# Altium PCB PCB_EPM.PcbDoc
Units mm, origin at the board's own origin, x right, y up, seen from the top; angles counter-clockwise.
Board outline 75.25 x 43.29 mm, 4 copper layers (Top Layer, Internal Plane 1, Internal Plane 2, Bottom Layer); 53 components, 48 nets, 228 pads, 45 vias.
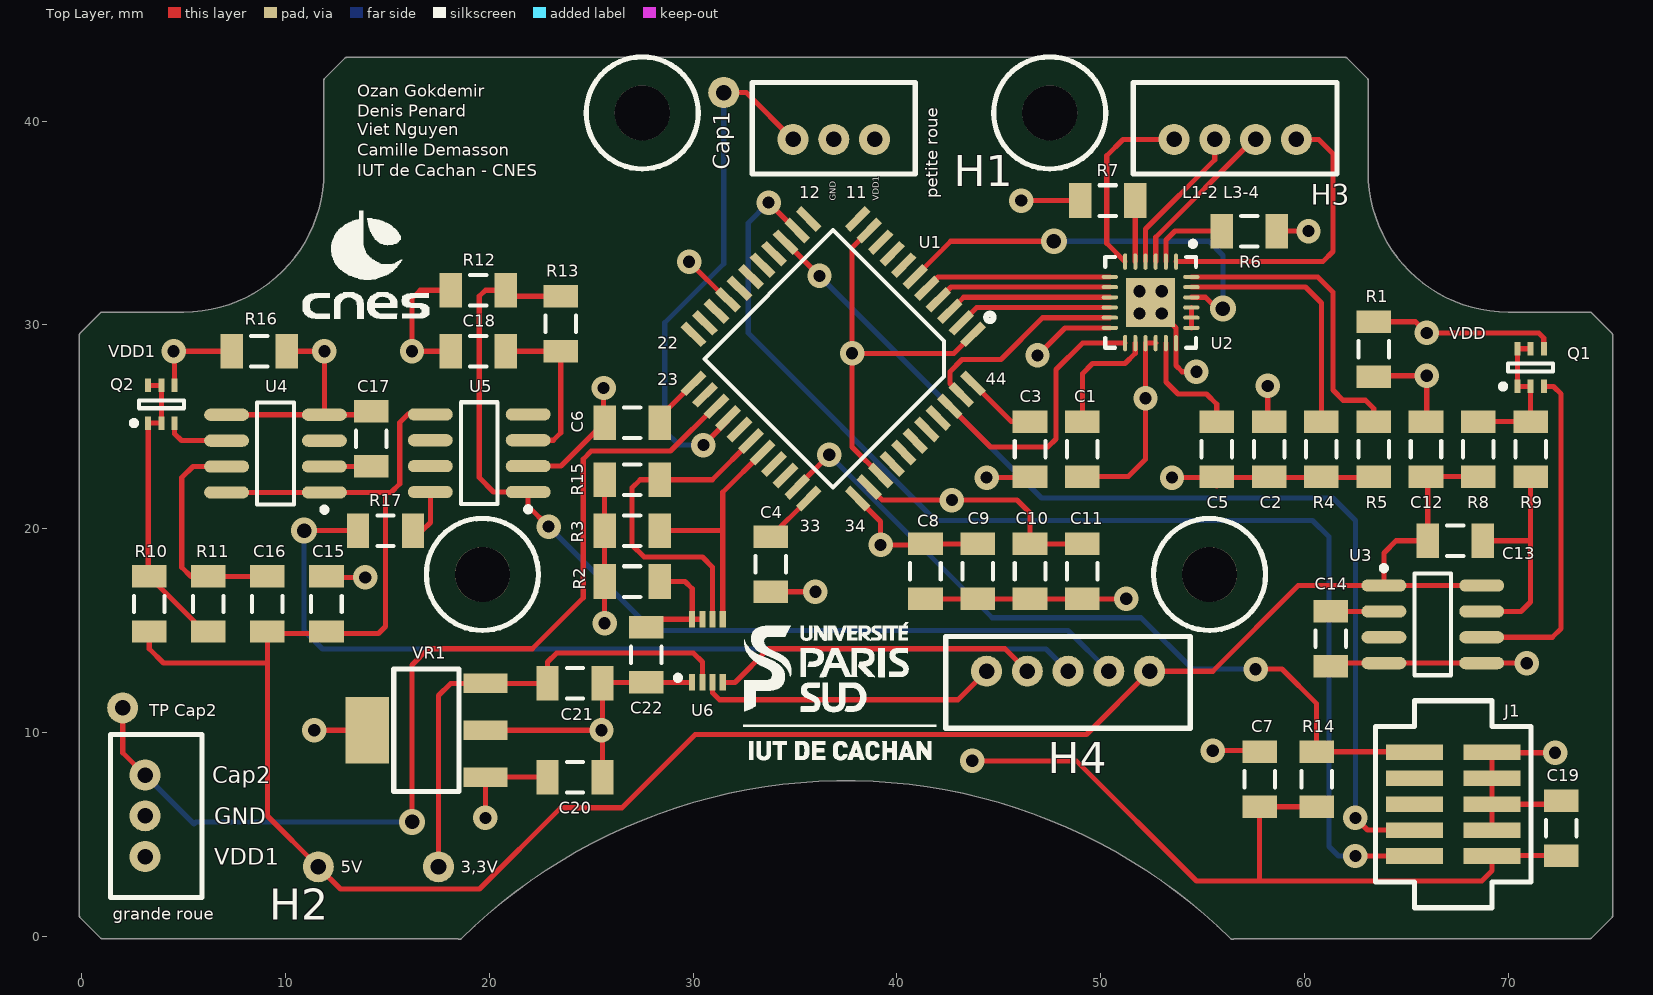
[diagram p0: Top Layer view]
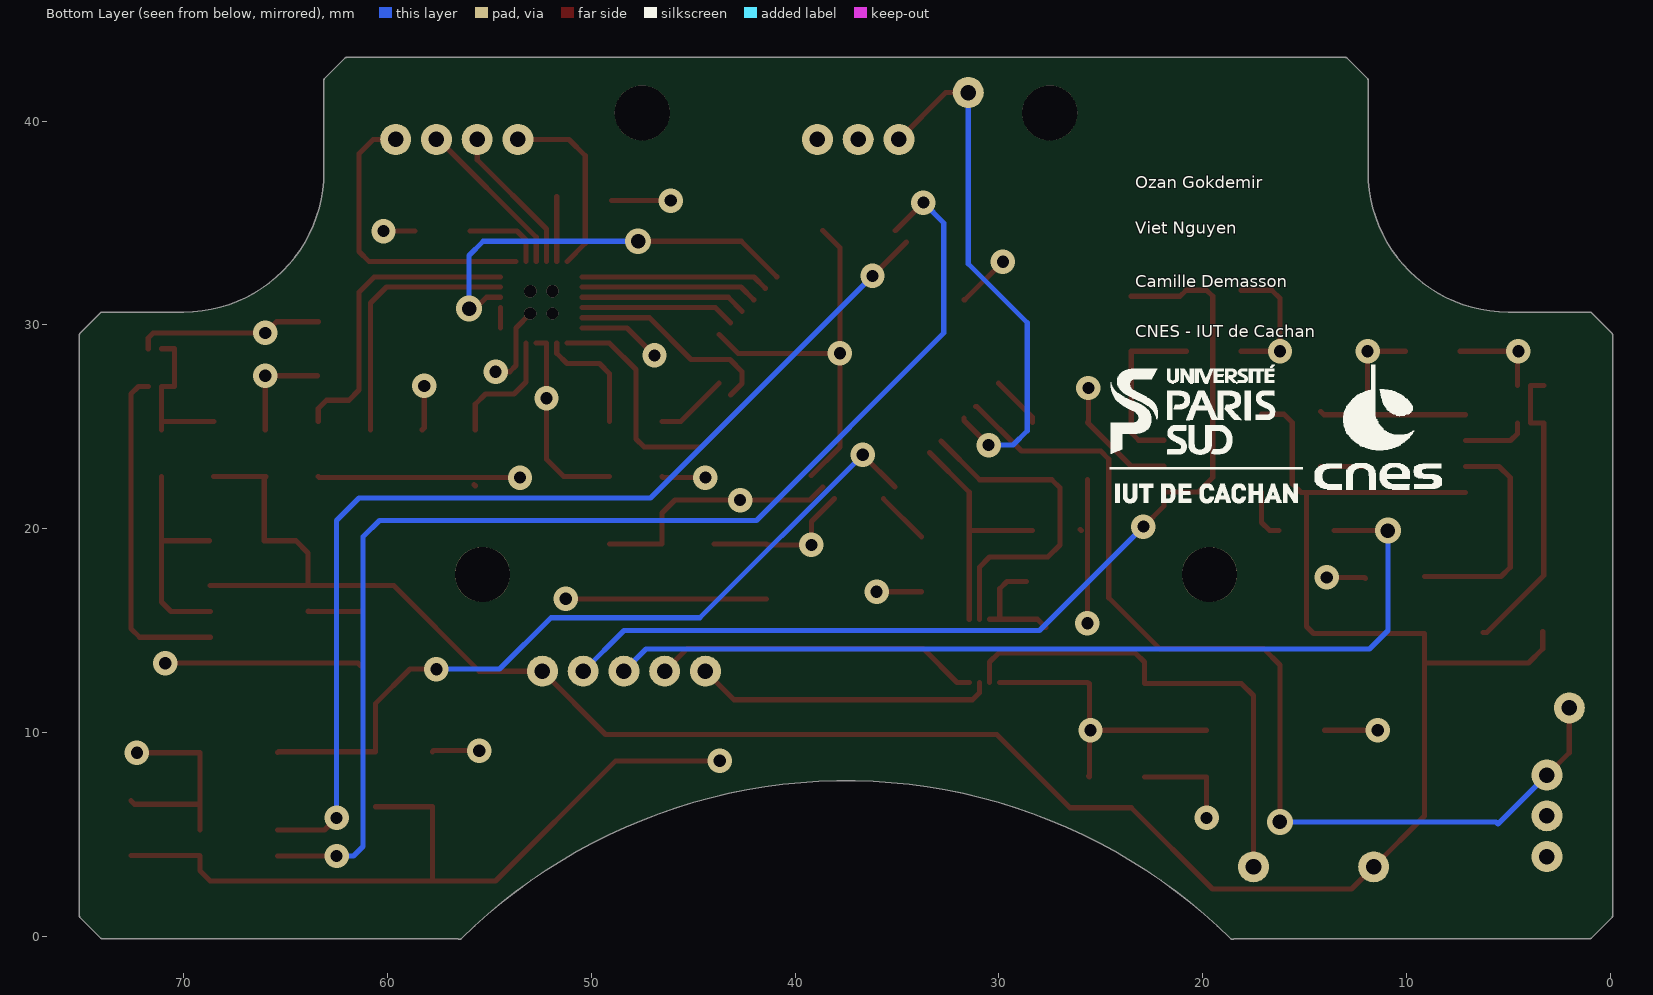
[diagram p1: Bottom Layer view, seen from below]
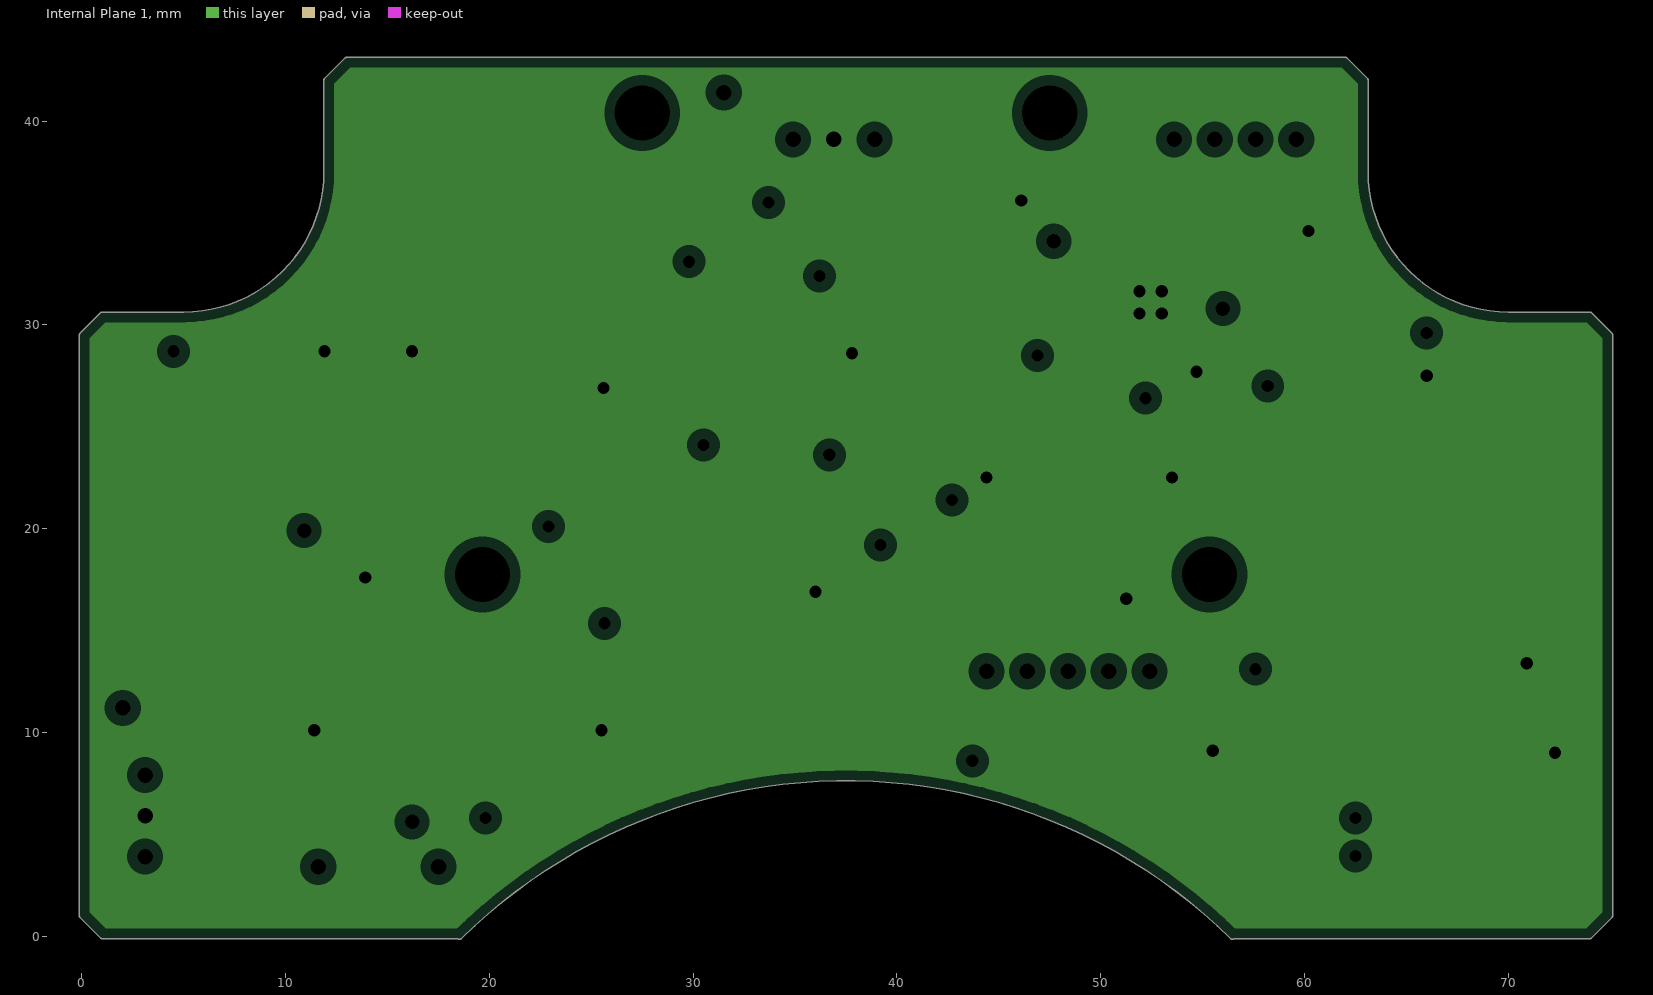
[diagram p2: Internal Plane 1, clearances drawn from the general rule]
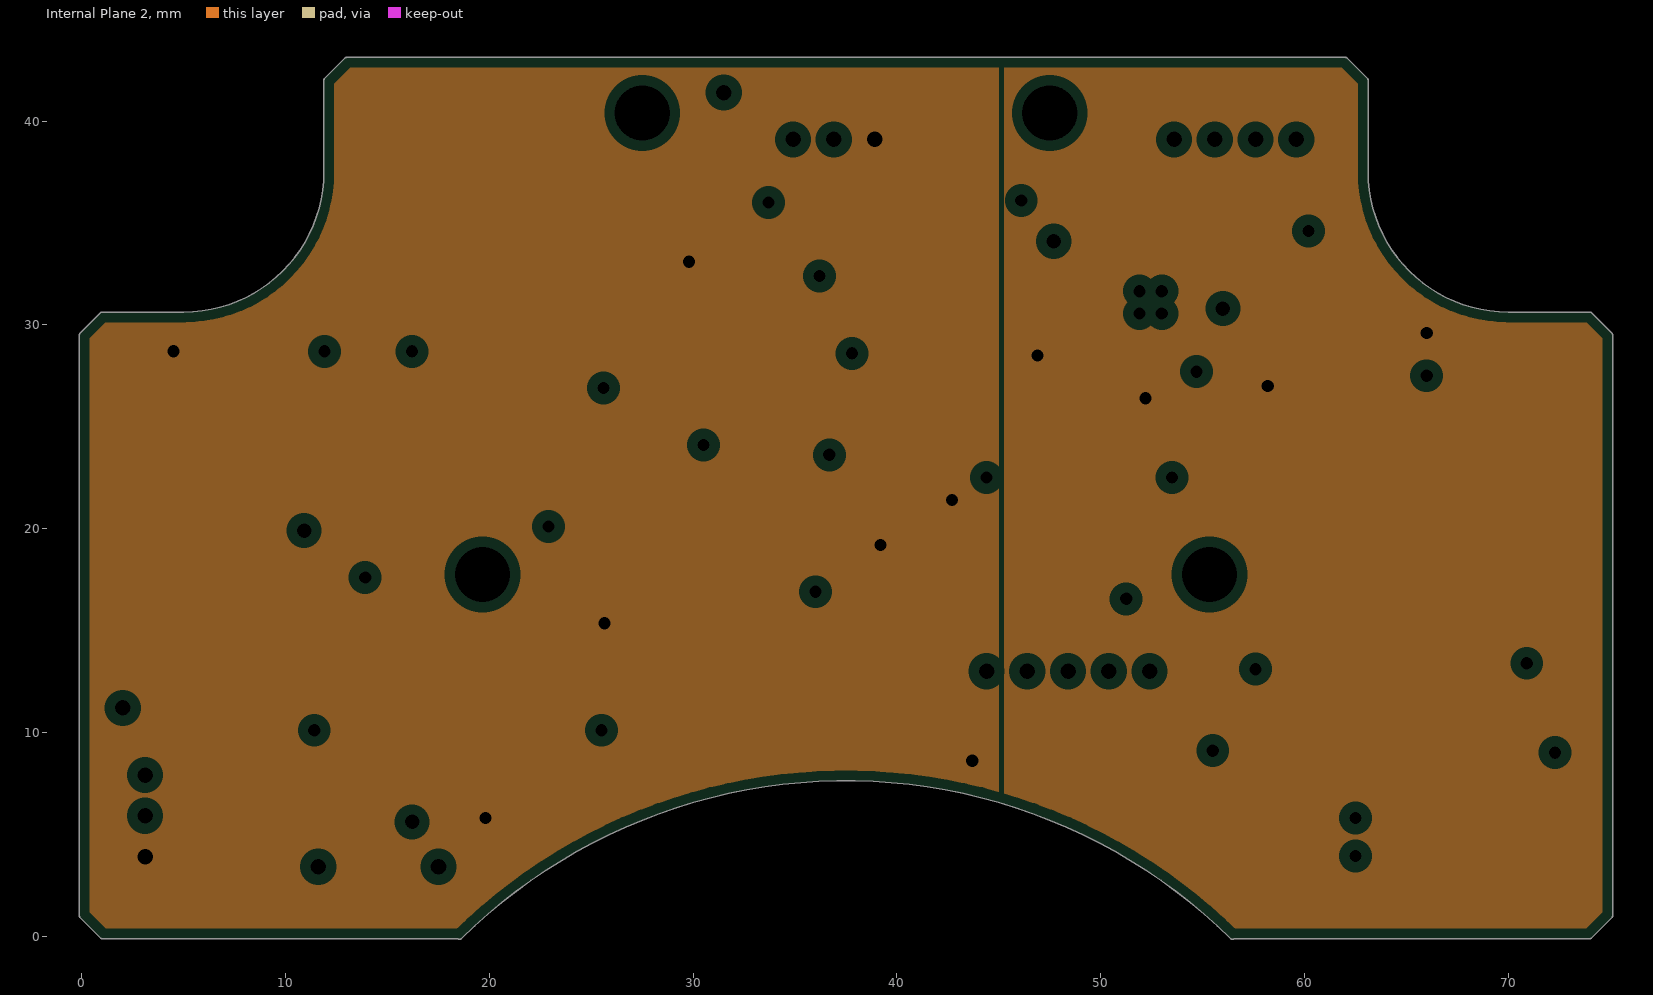
[diagram p3: Internal Plane 2, clearances drawn from the general rule]

## Layer stack, top to bottom
Top Solder: solder mask 0.0102, Solder Resist, Dk 3.5
Top Layer: signal copper 0.0356
Dielectric1: core 0.32, FR-4, Dk 4.8
Internal Plane 1: plane copper 0.0356, net GND
Dielectric2: prepreg 0.32, FR-4, Dk 4.8
Internal Plane 2: plane copper 0.0356, net (Multiple Nets)
Dielectric3: core 0.32, FR-4, Dk 4.8
Bottom Layer: signal copper 0.0356
Bottom Solder: solder mask 0.0102, Solder Resist, Dk 3.5

## Board outline
-0.09,0.909 cw(c0,1) -0.127,1 -0.127,29.5 cw(c0,29.5) -0.09,29.591 -0.09,29.59 0.91,30.59 0.909,30.59 cw(c1,30.5) 1,30.627 5,30.627 ccw(c5,37.5) 11.873,37.499 ccw(c5,37.5) 11.873,37.5 11.873,42 cw(c12,42) 11.91,42.091 11.91,42.09 12.91,43.09 12.909,43.09 cw(c13,43) 13,43.127 62,43.127 cw(c62,43) 62.091,43.09 62.09,43.09 63.09,42.09 63.09,42.091 cw(c63,42) 63.127,42 63.127,37.5 cw(c63,37.5) 63.127,37.499 ccw(c70,37.5) 70,30.627 74,30.627 cw(c74,30.5) 74.09,30.59 75.09,29.59 cw(c75,29.5) 75.127,29.5 75.127,1 cw(c75,1) 75.09,0.91 74.09,-0.09 cw(c74,0) 74,-0.127 56.553,-0.127 cw(c56.467,-0.034) 56.377,-0.125 ccw(c37.5,-19.25) 18.623,-0.125 cw(c18.533,-0.034) 18.447,-0.127 1,-0.127 cw(c1,0) 0.909,-0.09 0.91,-0.09

## Design rules (kind name [scope] priority, off if disabled: settings)
Clearance [All] p1: gap=0.2
ComponentClearance ComponentClearance_psoc [InComponent('U1')] p1: gap=0 collisioncheckmode=3 verticalgap=0 showdistances=FALSE
ComponentClearance [All] p2: gap=0.254 collisioncheckmode=3 verticalgap=0.254 showdistances=FALSE
MinimumSolderMaskSliver [All] p1: minsoldermaskwidth=0.1
PlaneClearance [All] p1: clearance=0.508
PlaneConnect PlaneConnect_driver [(InNet('GND') AND InComponent('U2'))] p1: planeconnectstyle=Direct reliefexpansion=0.508 reliefentries=4 reliefconductorwidth=0.254 reliefairgap=0.254
PlaneConnect [All] p2: planeconnectstyle=Relief reliefexpansion=0.508 reliefentries=4 reliefconductorwidth=0.254 reliefairgap=0.254
PolygonConnect [All] p1: connectstyle=Relief reliefconductorwidth=0.254 reliefentries=4 polygonreliefangle="90 Angle" airgapwidth=0.254
RoutingVias [All] p1: holewidth=0.711 width=1.27 viastyle="Through Hole" minholewidth=0.711 minwidth=1.27 maxholewidth=0.711 maxwidth=1.27
SolderMaskExpansion [All] p1: expansion=0.102
Width [All] p1: maxlimit=0.254 minlimit=0.254 preferedwidth=0.254
26 further rules are at their usual default settings.

## Classes and differential pairs
component class "Microcontrôleur PSoC 4": C3 C4 C6 C8 C9 C10 C11 C22 R2 R3 R15 U6
component class "Pilote du Moteur": C1 C2 C5 R4 R5 R6 R7 U2
component class sch_epm4.0: C19 H1 H3 H4 J1
component class Alimentation: C12 C13 C14 C15 C16 C17 C18 C20 C21 Q1 Q2 R1 R8 R9 R10 R11 R12 R13 R16 R17 U3 U4 U5 VR1

## Components (designator, comment, footprint, x,y, rotation, side; value= is the part's Value field where it differs from the comment)
C1 "Cap Semi" C1206 49.1,23.9 r270 top
C2 "Cap Semi" C1206 58.267,23.9 r270 top
C3 "" C1206 46.533,23.9 r270 top
C4 "" C1206 33.8,18.25 r90 top
C5 "Cap Semi" C1206 55.7,23.9 r90 top
C6 "" C1206 27,25.2 r0 top
C7 "" C1206 57.8,7.7 r270 top
C8 "" C1206 41.4,17.9 r90 top
C9 "" C1206 43.967,17.9 r90 top
C10 "" C1206 46.533,17.9 r90 top
C11 "" C1206 49.1,17.9 r90 top
C12 "Cap Semi" C1206 65.967,23.9 r90 top
C13 "Cap Semi" C1206 67.4,19.4 r0 top
C14 "Cap Semi" C1206 61.3,14.6 r270 top
C15 "Cap Semi" C1206 12,16.3 r90 top
C16 "Cap Semi" C1206 9.1,16.3 r90 top
C17 "Cap Semi" C1206 14.2,24.4 r90 top
C18 "Cap Semi" C1206 19.45,28.7 r0 top
C19 "" C1206 72.6,5.3 r270 top
C20 "Cap Semi" C1206 24.2,7.8 r0 top
C21 "Cap Semi" C1206 24.2,12.4 r0 top
C22 "" C1206 27.7,13.8 r90 top
H1 "MOLEX" B3B-PH-K-S 32.9,37.4 r0 top
H2 "MOLEX" B3B-PH-K-S 1.4,9.9 r270 top
H3 "MOLEX" B4B-PH-K-S 51.6,37.4 r0 top
H4 "MOLEX" B5B-PH-K-S 54.4,14.7 r180 top
J1 "connecteur programmation PSoC" 50MIL_KEYED_SMD 69.21,3.93 r180 top
Q1 "MOSFET-N" ONSC-SC70-6-419B-02_V 71.1,27.9 r90 top
Q2 "MOSFET-N" ONSC-SC70-6-419B-02_V 3.9,26.1 r90 top
R1 "Res3" C1206 63.4,28.8 r90 top
R2 "R2" C1206 27,17.4 r180 top
R3 "" C1206 27,19.9 r180 top
R4 "Res3" C1206 60.833,23.9 r90 top
R5 "Res3" C1206 63.4,23.9 r90 top
R6 "Res3" C1206 57.3,34.6 r180 top
R7 "Res3" C1206 50.35,36.1 r180 top
R8 "Res3" C1206 68.533,23.9 r270 top
R9 "Res3" C1206 71.1,23.9 r270 top
R10 "Res3" C1206 3.3,16.3 r270 top
R11 "Res3" C1206 6.2,16.3 r90 top
R12 "Res3" C1206 19.45,31.7 r0 top
R13 "Res3" C1206 23.5,30.05 r270 top
R14 "" C1206 60.6,7.7 r270 top
R15 "" C1206 27,22.4 r180 top
R16 "Res3" C1206 8.7,28.7 r0 top
R17 "Res3" C1206 14.9,19.9 r0 top
U1 "CY8C4245AXI-483 44TQFP" CY8C4xxxAXI 43.728,29.533 r225 top
U2 "DRV8834RGET" QFN24 52.45,31.1 r270 top
U3 "LTC1153" "S8 Package" 66.3,15.3 r0 top
U4 "LTC1153" "S8 Package" 9.5,23.68 r180 top
U5 "DS2438" SO8_N 19.5,23.7 r180 top
U6 "PCA9306" VSSOP8 30.7,14 r90 top
VR1 "Volt Reg" Reg_LM317 14.8,10.1 r90 top

## Footprints (in the part's own frame and the unit in brackets; to place one, negate y for a bottom-side part, rotate by r counter-clockwise, add the part's x,y. Pads: shape width x height; smd on the part's side, far side on the other; paste and mask are expansions set on the pad)
50MIL_KEYED_SMD [mil]
  rect 110x30 smd: 1(0,0) 2(150,0) 3(0,-50) 4(150,-50) 5(0,-100) 6(150,-100) 7(0,-150) 8(150,-150) 9(0,-200) 10(150,-200)
  silkscreen extent -75,-300 225,100
B3B-PH-K-S [mil] "Connecteur JST série PH 3 broches"
  round 60 hole 30: 1(78.74,66.93) 2(157.48,66.93) 3(236.22,66.93)
  silkscreen extent 0,0 315,177
B4B-PH-K-S [mil] "Connecteur JST série PH 4 broches"
  round 60 hole 30: 1(78.74,66.93) 2(157.48,66.93) 3(236.22,66.93) 4(314.96,66.93)
  silkscreen extent 0,0 394,177
B5B-PH-K-S [mil] "Connecteur JST série PH 5 broches"
  round 60 hole 30: 1(78.74,66.93) 2(157.48,66.93) 3(236.22,66.93) 4(314.96,66.93) 5(393.7,66.93)
  silkscreen extent 0,0 472,177
C1206 [mm] "Chip Capacitor, Body 3.2x1.6mm, IPC High Density"
  rect 1.1x1.7 smd: 1(-1.35,0) 2(1.35,0)
  silkscreen extent -0.4,-0.75 0.4,0.75, body extent -1.7,-0.9 1.7,0.9, height 1.3
CY8C4xxxAXI [mm]
  rect 1.4x0.4 smd mask+0.1: 1(0,0) 2(0,-0.8) 3(0,-1.6) 4(0,-2.4) 5(0,-3.2) 6(0,-4) 7(0,-4.8) 8(0,-5.6) 9(0,-6.4) 10(0,-7.2) 11(0,-8) 23(11.4,-8) 24(11.4,-7.2) 25(11.4,-6.4) 26(11.4,-5.6) 27(11.4,-4.8) 28(11.4,-4) 29(11.4,-3.2) 30(11.4,-2.4) 31(11.4,-1.6) 32(11.4,-0.8) 33(11.4,0)
  rect 0.4x1.4 smd mask+0.1: 12(1.7,-9.7) 13(2.5,-9.7) 14(3.3,-9.7) 15(4.1,-9.7) 16(4.9,-9.7) 17(5.7,-9.7) 18(6.5,-9.7) 19(7.3,-9.7) 20(8.1,-9.7) 21(8.9,-9.7) 22(9.7,-9.7) 34(9.7,1.7) 35(8.9,1.7) 36(8.1,1.7) 37(7.3,1.7) 38(6.5,1.7) 39(5.7,1.7) 40(4.9,1.7) 41(4.1,1.7) 42(3.3,1.7) 43(2.5,1.7) 44(1.7,1.7)
  silkscreen extent -1.36,-8.47 10.17,0.46
ONSC-SC70-6-419B-02_V [mm] "SOT23, 6-Leads, Body 2x1.25mm, Pitch 0.65mm"
  rect 0.66x0.3 smd: 1(-0.925,0.65) 2(-0.925,0) 3(-0.925,-0.65) 4(0.925,-0.65) 5(0.925,0) 6(0.925,0.65)
  silkscreen extent -1.05,-1.1 0.2,1.47, body extent -0.63,-1 0.63,1, height 1.1
QFN24 [mm] "QFN, 24-Leads, Body 4,00x4,00mm, Pitch 0,50mm, Thermal Pad 2,40x2,40mm, IPC Medium Density"
  oval 0.8x0.2 smd: 1(-2,1.25) 2(-2,0.75) 3(-2,0.25) 4(-2,-0.25) 5(-2,-0.75) 6(-2,-1.25) 13(2,-1.25) 14(2,-0.75) 15(2,-0.25) 16(2,0.25) 17(2,0.75) 18(2,1.25)
  oval 0.2x0.8 smd: 7(-1.25,-2) 8(-0.75,-2) 9(-0.25,-2) 10(0.25,-2) 11(0.75,-2) 12(1.25,-2) 19(1.25,2) 20(0.75,2) 21(0.25,2) 22(-0.25,2) 23(-0.75,2) 24(-1.25,2)
  rect 2.4x2.4 smd: 25(0,0)
  silkscreen extent -3,-2.22 2.22,2.23, body extent -2.08,-2.07 2.07,2.08, height 1
Reg_LM317 [mm]
  rect 0.95x2.15 smd mask+0.07: 1(-2.3,-5) 2(0,-5) 3(2.3,-5)
  rect 3.25x2.15 smd mask+0.07: 4(0,0.8)
  silkscreen extent -3,-3.7 3,-0.5
"S8 Package" [mm] "SOIC, 8-Leads, Body 4,90x3,90mm, Pitch 1,27mm, IPC Medium Density"
  oval 2.2x0.6 smd: 1(-2.4,1.905) 2(-2.4,0.635) 3(-2.4,-0.635) 4(-2.4,-1.905) 5(2.4,-1.905) 6(2.4,-0.635) 7(2.4,0.635) 8(2.4,1.905)
  silkscreen extent -2.52,-2.5 0.9,2.88, body extent -2,-2.5 2,2.5, height 1.76
SO8_N [mm] "SOIC, 8-Leads, Body 4.9x3.9mm, Pitch 1.27mm, IPC Medium Density"
  oval 2.2x0.6 smd: 1(-2.4,1.905) 2(-2.4,0.635) 3(-2.4,-0.635) 4(-2.4,-1.905) 5(2.4,-1.905) 6(2.4,-0.635) 7(2.4,0.635) 8(2.4,1.905)
  silkscreen extent -2.53,-2.5 0.9,2.88, body extent -2,-2.5 2,2.5, height 1.75
VSSOP8 [mm] "TSSOP, 8-Leads, Body 2,00x2,30mm"
  rect 0.8x0.3 smd paste+0 mask+0.05: 1(-1.55,0.75) 2(-1.55,0.25) 3(-1.55,-0.25) 4(-1.55,-0.75) 5(1.55,-0.75) 6(1.55,-0.25) 7(1.55,0.25) 8(1.55,0.75)
  silkscreen extent -1.45,1.33 -1.2,1.57, body extent -1.2,-1.05 1.2,1.05, height 0.9

## Part data
C1 C2 C5 C12 C13 C14 C15 C16 C17 C18 C20 C21: "Capacitor (Semiconductor SIM Model)"
C3 C4 C6 C7 C8 C9 C10 C11 C19 C22: library part "Cap Semi", "Capacitor (Semiconductor SIM Model)"
H1 H2: library part "Molex Male 3 broches", "MOLEX-53048-0510_FARNELL_9732918"
H3: library part "Molex Male 4 broches_1", "MOLEX-53048-0510_FARNELL_2064326"
H4: library part "Molex Male 5 broches", "MOLEX-53048-0510_FARNELL_2064326"
J1: library part "Header 5X2", "Header, 5-Pin, Dual row"
Q1 Q2: library part CMP-1058-00626-1, "Trench Power MOSFET, 20 V, 4 A, Single N-Channel, 6-Pin SC70, Pb-Free, Tape and Reel"
R1 R4 R5 R6 R7 R8 R9 R10 R11 R12 R13 R16 R17: "Resistor"
R2 R3 R14 R15: library part Res1, "Resistor"
U1: library part CY8C4xxxAXI
U5: "Battery Monitor"
VR1: "Voltage Regulator"

## Free pads (board coordinates)
  round 1.524 hole 0.762: 0(11.6,3.4) 0(17.5,3.4) 0(31.5,41.4) 2(2,11.2)
  round 2.7 hole 2.7 unplated: 0(19.655,17.75) 0(27.5,40.4) 0(47.5,40.4) 0(55.345,17.75)

## Via types
v1: diameter 1.2, hole 0.6, Top Layer to Bottom Layer, 37 vias
v2: diameter 1.27, hole 0.711, Top Layer to Bottom Layer, 4 vias
v3: diameter 0.6, hole 0.6, Top Layer to Bottom Layer, 4 vias

## Nets (pads, with @x,y where several pads share a name; then routed paths per layer and width w, separated by ;. In a path a pad name is that pad's centre, name@x,y a point inside that pad or via, vN(x,y) a via of type N, cw(c..) or ccw(c..) an arc to the next point about the centre after c; other vN are vias at no path point)
3.3V: C21.1 pad.0@17.5,3.4 U6.2 VR1.3 | length 24.3
  Top Layer w0.254: pad.0@17.5,3.1 17.5,3.4 17.5,11.8 18.1,12.4 VR1.3 C21.1 22.85,13.45 23.3,13.9 30,13.9 30.45,13.45 U6.2
5V: C12.1 C13.1 C15.1 C16.1 H4.1 pad.0@11.6,3.4 R8.2 R10.2 U3.1 U3.8 U4.1 U4.8 U5.5 | length 118.8
  Top Layer w0.254: R10.2 3.3,14.1 4,13.4 9.1,13.4 ; U4.8 U4.1 14.9,21.775 ; U5.5@17.1,25.61 16.01,25.61 15.6,25.2 15.6,22.2 15.175,21.775 14.9,21.775 ; U3.1 63.9,18.8 64.5,19.4 C13.1 66.05,22.467 C12.1 R8.2 ; U3.8 65.3,17.205 65.295,17.2 59.7,17.2 55.5,13 H4.1 49.3,9.9 30.1,9.9 26.5,6.3 23.5,6.3 19.511,2.311 12.689,2.311 11.6,3.4 9.1,5.9 9.1,13.4 ; 9.1,13.4 9.1,14.85 14.55,14.85 14.9,15.2 14.9,21.775
/XRES: J1.10 R14.1 U1.32 | length 38.4
  Top Layer w0.254: U1.32 v1(36.682,23.618) ; v1(57.6,13.1) 58.9,13.1 60.6,11.4 R14.1 65.36,9.05 J1.10
  Bottom Layer w0.254: v1(36.682,23.618) 44.677,15.623 51.977,15.623 54.5,13.1 v1(57.6,13.1)
CAP1: H1.1 pad.0@31.5,41.4 U1.26 | length 26.2
  Top Layer w0.254: v1(30.5,24.1) 31.708,25.308 U1.26 ; pad.0@31.5,41.4 32.6,41.4 H1.1
  Bottom Layer w0.254: v1(30.5,24.1) 29.3,24.1 28.6,24.8 28.6,30.1 31.5,33 pad.0@31.5,41.4
CAP2: H2.1 pad.2 U1.25 | length 49.8
  Top Layer w0.254: pad.2 2,9 H2.1 ; v2(16.2,5.6) 16.2,13.3 17,14.1 22.1,14.1 24.6,16.6 24.6,23.4 25,23.8 28.889,23.8 31.086,25.997 U1.25
  Bottom Layer w0.254: H2.1 5.5,5.5 5.6,5.6 v2(16.2,5.6)
DIR: U1.3 U2.9 | length 8.1
  Top Layer w0.254: U1.3 43.283,31.35 U2.9
DQ: H4.3 R17.1 | length 45.9
  Top Layer w0.254: v2(10.9,19.9) R17.1
  Bottom Layer w0.254: v2(10.9,19.9) 10.9,15 11.811,14.089 47.311,14.089 H4.3
GND: C2.2 C3.2 C4.1 C5.1 C6.1 C7.1 C8.1 C9.1 C10.1 C11.1 C12.2 C14.2 C15.2 C17.2 C18.1 C19.1 C20.2 C21.2 C22.1 H1.2 H2.2 J1.3 J1.5 J1.7 J1.9 R1.1 R4.1 R5.1 R6.1 R7.2 R12.1 R16.2 U1.1 U1.10 U1.36 U2.18 U2.25 U3.4 U3.5 U4.4 U4.5 U5.2 U6.1 VR1.2 VR1.4 | length 123.9
  Top Layer w0.254: U4.5 U4.4 ; R16.2 v1(11.9,28.7) U4.4 ; v1(11.4,10.1) VR1.4 ; C15.2@12,17.55 12.05,17.6 v1(13.9,17.6) ; C17.2 14.035,25.585 U4.4 ; C18.1 v1(16.2,28.7) 16.2,31.3 16.6,31.7 R12.1 ; VR1.2 v1(25.5,10.1) ; U5.2 23.515,23.065 C6.1 25.6,25.25 v1(25.6,26.9) ; C21.2 25.55,10.15 v1(25.5,10.1) ; C20.2@25.6,7.85 C20.2 25.55,10.05 v1(25.5,10.1) ; C21.2@25.6,12.4 25.65,12.45 C22.1 U6.1 ; C4.1 v1(36,16.9) ; U1.10 37.8,33.787 v1(37.8,28.6) ; U1.36 37.8,24.006 v1(37.8,28.6) ; C8.1 C9.1 C10.1 C11.1 v1(51.25,16.55) ; U1.1 42.796,28.6 v1(37.8,28.6) ; v1(44.4,22.5) 46.483,22.5 C3.2 ; v1(46.1,36.1) R7.2 ; v3(53,30.55) 53.7,29.85 U2.18 53.7,28 54,27.7 v1(54.7,27.7) ; v1(53.5,22.5) 63.35,22.5 R5.1 ; v1(55.5,9.1) 57.75,9.1 C7.1 ; C5.1@55.7,22.1 C5.1@55.75,22.15 ; R6.1 v1(60.2,34.6) ; C14.2@61.25,13.3 C14.2 61.445,13.395 U3.4 U3.5 70.905,13.395 v1(70.91,13.39) ; R1.1@63.45,27.5 v1(66,27.5) ; v1@65.95,27.45 v1(66,27.5) ; C12.2@66,24.85 v1(66,27.5) ; J1.3 J1.5 ; v1(72.3,9) 69.22,9 J1.9 J1.7 J1.5 ; C19.1 72.42,6.47 J1.5
  other v3: 51.9,30.55 51.9,31.65 53,31.65
GND0: H4.2 R12.2 R13.1 U5.1 | length 48.4
  Top Layer w0.254: v1(22.9,20.1) 21.9,21.1 U5.1 20.205,21.795 19.5,22.5 19.5,31.4 19.8,31.7 R12.2 21.1,31.4 R13.1
  Bottom Layer w0.254: v1(22.9,20.1) 28,15 48.4,15 H4.2
M0: U1.2 U2.10 | length 7.6
  Top Layer w0.254: U1.2 43.914,30.85 U2.10
M1: U1.43 U2.11 | length 10.3
  Top Layer w0.254: U1.43 42.6,27.125 42.6,27.7 43.2,28.3 45.1,28.3 47.15,30.35 U2.11
NEN: U1.5 U2.7 | length 9.2
  Top Layer w0.254: U1.5 42.02,32.35 U2.7
NetC3_1: C3.1 U1.44 | length 3.6
  Top Layer w0.254: U1.44 45.607,25.25 C3.1
NetC5_2: C5.2 U2.17 | length 6.1
  Top Layer w0.254: U2.17 53.2,27.189 53.789,26.6 55.2,26.6 55.7,26.1 C5.2 C5.2@55.7,24.85
NetC6_2: C6.2 U1.23 | length 2.6
  Top Layer w0.254: C6.2 28.35,25.468 U1.23
NetC13_2: C13.2 R9.2 U3.7 | length 11.1
  Top Layer w0.254: U3.7 70.635,15.935 71.1,16.4 71.1,19.4 ; C13.2 71.1,19.4 ; R9.2 71.1,19.4
NetC14_1: C14.1 U3.2 | length 2.6
  Top Layer w0.254: C14.1 61.315,15.935 U3.2 U3.2@63.885,15.95
NetC16_2: C16.2 R11.2 U4.7 | length 11.2
  Top Layer w0.254: U4.7 5.445,23.045 4.9,22.5 4.9,18.1 5.35,17.65 R11.2 C16.2
NetC17_1: C17.1 U4.2 | length 2.3
  Top Layer w0.254: U4.2 14.195,23.045 C17.1
NetC18_2: C18.2 R13.2 U5.3 | length 8.5
  Top Layer w0.254: C18.2 R13.2 23.5,24.7 23.135,24.335 U5.3
NetC22_2: C22.2 R2.1 U6.7 U6.8 | length 5.9
  Top Layer w0.254: C22.2 28.1,15.55 U6.8 ; R2.1@28.65,17.4 29.6,17.4 29.95,17.05 U6.8 ; U6.7 U6.8
NetQ1_1: Q1.1 Q1.2 Q1.5 Q1.6 R8.1 R9.1 | length 7.8
  Top Layer w0.254: R8.1 R9.1 ; R9.1@71.1,24.85 Q1.2 Q1.1 Q1.6 Q1.5
NetQ1_3: Q1.3 U3.6 | length 16.6
  Top Layer w0.254: U3.6 72.165,14.665 72.6,15.1 72.6,26.6 72.225,26.975 Q1.3
NetQ2_1: Q2.1 Q2.2 Q2.5 Q2.6 R10.1 R11.1 | length 14.8
  Top Layer w0.254: Q2.6 Q2.5 Q2.2 Q2.1 3.25,17.7 R10.1 6.05,14.9 R11.1@6.233,14.9
NetQ2_3: Q2.3 U4.6 | length 3.2
  Top Layer w0.254: Q2.3 4.55,24.65 4.885,24.315 U4.6
NetR4_2: R4.2 U2.23 | length 12.9
  Top Layer w0.254: U2.23 60.05,31.85 60.833,31.067 R4.2 R4.2@60.833,24.85
NetR5_2: R5.2 U2.24 | length 15.1
  Top Layer w0.254: U2.24 60.65,32.35 61.4,31.6 61.4,26.8 61.9,26.3 63,26.3 63.4,25.9 R5.2
NetR6_2: R6.2 U2.2 | length 4
  Top Layer w0.254: U2.2 53.2,34.158 53.642,34.6 R6.2
NetR7_1: R7.1 U2.5 | length 3.2
  Top Layer w0.254: U2.5 R7.1 R7.1@51.7,36.3
NetR17_2: R17.2 U5.8 | length 2.5
  Top Layer w0.254: R17.2 16.7,19.9 17.1,20.3 U5.8
NetU2_19: U2.19 U2.20 U2.21 | length 1
  Top Layer w0.254: U2.19 U2.20 U2.21
NFAULT: U1.42 U2.13 | length 13.5
  Top Layer w0.254: U1.42 44.594,24 47.4,24 47.8,24.4 47.8,27.8 49.1,29.1 U2.13
NSLEEP: U1.6 U2.22 | length 20.5
  Top Layer w0.254: U1.6 42.639,34.1 v2(47.7,34.1) ; U2.22 55.15,31.35 55.7,30.8 v2(56,30.8)
  Bottom Layer w0.254: v2(47.7,34.1) 55.3,34.1 56,33.4 v2(56,30.8)
OUT1A: H3.4 U2.1 | length 14.8
  Top Layer w0.254: U2.1 60.9,33.1 61.4,33.6 61.4,38.4 60.7,39.1 H3.4
OUT1B: H3.1 U2.6 | length 9.2
  Top Layer w0.254: U2.6 50.3,34 50.3,38.3 51.1,39.1 H3.1
OUT2A: H3.3 U2.3 | length 8.1
  Top Layer w0.254: U2.3 52.7,34.3 57.5,39.1 H3.3
OUT2B: H3.2 U2.4 | length 7.4
  Top Layer w0.254: U2.4 52.2,34.7 55.6,38.1 H3.2
SCL1: H4.5 U6.3 | length 14.7
  Top Layer w0.254: U6.3 30.95,11.938 31.288,11.6 43,11.6 H4.5
SCL2: R15.1 U1.28 U6.6 | length 16.5
  Top Layer w0.254: U6.6 30.95,18.1 30.45,18.6 27.6,18.6 27,19.2 27,22 27.4,22.4 R15.1 30.939,22.4 U1.28
SDA1: H4.4 U6.4 | length 16.1
  Top Layer w0.254: U6.4 32.05,12.45 33.7,14.1 45.3,14.1 H4.4
SDA2: R3.1 U1.29 U6.5 | length 12.1
  Top Layer w0.254: R3.1 31.45,19.9 ; U6.5 31.45,19.9 ; U1.29 31.45,21.78 31.45,19.9
STEP: U1.4 U2.8 | length 8.7
  Top Layer w0.254: U1.4 42.652,31.85 U2.8
SWDCLK: J1.4 U1.14 | length 51.4
  Top Layer w0.254: U1.14 36.194,32.4 v1(36.2,32.4) ; v1(62.5,5.8) 63.1,5.2 J1.4
  Bottom Layer w0.254: v1(36.2,32.4) 47.1,21.5 61.4,21.5 62.5,20.4 v1(62.5,5.8)
SWDIO: J1.2 U1.13 | length 61.1
  Top Layer w0.254: v1(33.7,36) 35.076,34.624 U1.13 ; v1(62.5,3.93) J1.2
  Bottom Layer w0.254: v1(33.7,36) 32.7,35 32.7,29.6 41.9,20.4 60.4,20.4 61.2,19.6 61.2,4.4 61.67,3.93 v1(62.5,3.93) v1@62.6,3.93
VCDD: C4.2 U1.33 | length 2.6
  Top Layer w0.254: C4.2 35.667,21.467 U1.33
VCP: C1.1 U2.14 | length 5.9
  Top Layer w0.254: C1.1 49.1,27.6 49.6,28.1 51.2,28.1 51.7,28.6 U2.14
VDD: C1.2 C2.1 Q1.4 R1.2 U2.12 U2.15 U2.16 | length 25.2
  Top Layer w0.254: v1(46.9,28.5) 48.25,29.85 U2.12 ; C1.2 51.35,22.55 52.2,23.4 v1(52.2,26.4) U2.15 U2.16 ; v1(58.2,27) 58.2,24.95 C2.1@58.3,24.85 ; R1.2 65.45,30.15 v1(66,29.6) 71.5,29.6 71.75,29.35 Q1.4
VDD1: C7.2 C8.2 C9.2 C10.2 C11.2 C19.2 C20.1 H1.3 H2.3 J1.1 Q2.4 R2.2 R3.2 R14.2 R15.2 R16.1 U1.19 U1.34 U1.35 VR1.1 | length 78.2
  Top Layer w0.254: Q2.4 4.55,28.65 v1(4.5,28.7) R16.1 ; v1(19.8,5.8) VR1.1 C20.1 ; v1(25.65,15.35) R2.2 R3.2 R15.2 ; R3.2@25.95,19.9 R3.2@26,19.95 ; v1(29.8,33.1) 31.67,31.23 U1.19 ; U1.34 39.2,20.343 v1(39.2,19.2) 41.35,19.2 C8.2 C9.2 ; U1.35 39.275,21.4 v1(42.7,21.4) 45.9,21.4 46.533,20.767 C10.2 C11.2 ; v1(43.7,8.6) 48.8,8.6 54.7,2.7 57.8,2.7 ; R14.2 C7.2 57.8,2.7 ; C19.2 69.23,3.95 J1.1 69.21,3.21 68.7,2.7 57.8,2.7
pads on no net: J1.6 J1.8 U1.7 U1.8 U1.9 U1.11 U1.12 U1.15 U1.16 U1.17 U1.18 U1.20 U1.21 U1.22 U1.24 U1.27 U1.30 U1.31 U1.37 U1.38 U1.39 U1.40 U1.41 U3.3 U4.3 U5.4 U5.6 U5.7

## Polygon pours and split planes (outlines as drawn)
GND on Internal Plane 1 (split plane): 62.617,41.841 62.617,37.502 62.586,37.503 62.585,37.5 62.617,37.5 62.617,37.499 62.627,37.114 62.657,36.728 62.708,36.345 62.778,35.965 62.868,35.589 62.978,35.218 63.107,34.854 63.255,34.497 63.422,34.148 63.606,33.808 63.808,33.479 64.027,33.16 64.262,32.854 64.513,32.56 64.779,32.279 65.06,32.013 65.354,31.762 65.66,31.527 65.979,31.308 66.308,31.106 66.648,30.922 66.997,30.755 67.354,30.607 67.718,30.478 68.089,30.368 68.465,30.278 68.845,30.208 69.228,30.157 69.614,30.127 70,30.117 73.841,30.117 74.617,29.341 74.617,1.159 73.841,0.383 56.585,0.383 56.331,0.63 55.786,1.133 55.227,1.62 54.656,2.093 54.072,2.55 53.475,2.99 52.867,3.415 52.248,3.823 51.617,4.213 50.977,4.587 50.326,4.943 49.667,5.282 48.998,5.602 48.321,5.904 47.636,6.188 46.943,6.453 46.243,6.7 45.538,6.927 44.826,7.135 44.109,7.324 43.387,7.493 42.66,7.643 41.93,7.772 41.197,7.882 40.461,7.973 39.722,8.043 38.982,8.093 38.242,8.123 37.5,8.133 36.758,8.123 36.018,8.093 35.278,8.043 34.539,7.973 33.803,7.882 33.07,7.772 32.34,7.643 31.613,7.493 30.891,7.324 30.174,7.135 29.462,6.927 28.757,6.7 28.057,6.453 27.364,6.188 26.679,5.904 26.002,5.602 25.333,5.282 24.674,4.943 24.023,4.587 23.383,4.213 22.752,3.823 22.133,3.415 21.525,2.99 20.928,2.55 20.344,2.093 19.773,1.62 19.214,1.133 18.669,0.63 18.415,0.383 1.159,0.383 0.383,1.159 0.383,29.341 1.159,30.117 5,30.117 5.386,30.127 5.772,30.157 6.155,30.208 6.535,30.278 6.911,30.368 7.282,30.478 7.646,30.607 8.003,30.755 8.352,30.922 8.692,31.106 9.021,31.308 9.34,31.527 9.646,31.762 9.94,32.013 10.221,32.279 10.487,32.56 10.738,32.854 10.973,33.16 11.192,33.479 11.394,33.808 11.578,34.148 11.745,34.497 11.893,34.854 12.022,35.218 12.132,35.589 12.222,35.965 12.292,36.345 12.343,36.728 12.373,37.114 12.383,37.499 12.383,37.5 12.383,41.841 13.159,42.617 61.841,42.617
VDD on Internal Plane 2 (split plane): 62.617,41.841 62.617,37.502 62.586,37.503 62.585,37.5 62.617,37.5 62.617,37.499 62.627,37.114 62.657,36.728 62.708,36.345 62.778,35.965 62.868,35.589 62.978,35.218 63.107,34.854 63.255,34.497 63.422,34.148 63.606,33.808 63.808,33.479 64.027,33.16 64.262,32.854 64.513,32.56 64.779,32.279 65.06,32.013 65.354,31.762 65.66,31.527 65.979,31.308 66.308,31.106 66.648,30.922 66.997,30.755 67.354,30.607 67.718,30.478 68.089,30.368 68.465,30.278 68.845,30.208 69.228,30.157 69.614,30.127 70,30.117 73.841,30.117 74.617,29.341 74.617,1.159 73.841,0.383 56.585,0.383 56.331,0.63 55.786,1.133 55.227,1.62 54.656,2.093 54.072,2.55 53.475,2.99 52.867,3.415 52.248,3.823 51.617,4.213 50.977,4.587 50.326,4.943 49.667,5.282 48.998,5.602 48.321,5.904 47.636,6.188 46.943,6.453 46.243,6.7 45.538,6.927 45.259,7.008 45.259,42.617 61.841,42.617
VDD1 on Internal Plane 2 (split plane): 45,7.084 44.826,7.135 44.109,7.324 43.387,7.493 42.66,7.643 41.93,7.772 41.197,7.882 40.461,7.973 39.722,8.043 38.982,8.093 38.242,8.123 37.5,8.133 36.758,8.123 36.018,8.093 35.278,8.043 34.539,7.973 33.803,7.882 33.07,7.772 32.34,7.643 31.613,7.493 30.891,7.324 30.174,7.135 29.462,6.927 28.757,6.7 28.057,6.453 27.364,6.188 26.679,5.904 26.002,5.602 25.333,5.282 24.674,4.943 24.023,4.587 23.383,4.213 22.752,3.823 22.133,3.415 21.525,2.99 20.928,2.55 20.344,2.093 19.773,1.62 19.214,1.133 18.669,0.63 18.415,0.383 1.159,0.383 0.383,1.159 0.383,29.341 1.159,30.117 5,30.117 5.386,30.127 5.772,30.157 6.155,30.208 6.535,30.278 6.911,30.368 7.282,30.478 7.646,30.607 8.003,30.755 8.352,30.922 8.692,31.106 9.021,31.308 9.34,31.527 9.646,31.762 9.94,32.013 10.221,32.279 10.487,32.56 10.738,32.854 10.973,33.16 11.192,33.479 11.394,33.808 11.578,34.148 11.745,34.497 11.893,34.854 12.022,35.218 12.132,35.589 12.222,35.965 12.292,36.345 12.343,36.728 12.373,37.114 12.383,37.499 12.383,37.5 12.383,41.841 13.159,42.617 45,42.617

## Other copper
Internal Plane 2 (plane layer: these items are gaps in the copper):
  lines w0.254: 45.129,6.492 45.129,42.992

## Silkscreen, mask and mechanical layers (free items; w line width, h text height)
Top Overlay:
  drawing of 2257 lines, arcs and shapes, not listed
  text "Ozan Gokdemir" at 13.5,41.2 h0.6
  text "Denis Penard" at 13.5,40.2 h0.6
  text "Viet Nguyen" at 13.5,39.3 h0.6
  text "Camille Demasson" at 13.5,38.3 h0.6
  text "Cap1" at 31.8,37.6 h0.8 r90
  text "IUT de Cachan - CNES" at 13.5,37.3 h0.6
  text "petite roue" at 42,36.2 h0.6 r90
  text "L1-2 L3-4" at 54,36.2 h0.6
  text "GND" at 37,36.1 h0.3 r90
  text "VDD1" at 39.1,36.1 h0.3 r90
  text "VDD" at 67.1,29.3 h0.6
  text "VDD1" at 1.3,28.4 h0.6
  text "TP Cap2" at 3.3,10.8 h0.6
  text "Cap2" at 6.4,7.5 h0.8
  text "GND" at 6.5,5.5 h0.8
  text "VDD1" at 6.5,3.5 h0.8
  text "5V" at 12.7,3.1 h0.6
  text "3,3V" at 18.6,3.1 h0.6
  text "grande roue" at 1.5,0.8 h0.6
Bottom Overlay:
  drawing of 2285 lines, arcs and shapes, not listed
  text "Ozan Gokdemir" at 23.3,36.7 h0.6
  text "Viet Nguyen" at 23.3,34.467 h0.6
  text "Camille Demasson" at 23.3,31.833 h0.6
  text "CNES - IUT de Cachan" at 23.3,29.4 h0.6
Mechanical 1:
  lines w0.254: 18.533,-0.034 cw(c37.5,-19.25) 56.467,-0.034 ; 18.533,0 1,0 0,1 0,29.5 1,30.5 5,30.5 ccw(c5,37.5) 12,37.5 12,42 13,43 62,43 63,42 63,37.5 ccw(c70,37.5) 70,30.5 74,30.5 75,29.5 75,1 74,0 56.467,0

## Text inside footprints (layer, text, board x,y; h text height)
U1: Top Overlay "11" at 37.5,36.2 h0.6; Top Overlay "12" at 35.2,36.2 h0.6; Top Overlay "22" at 28.234,28.834 h0.6; Top Overlay "23" at 28.234,27.034 h0.6; Top Overlay "33" at 35.234,19.834 h0.6; Top Overlay "34" at 37.434,19.834 h0.6; Top Overlay "44" at 44.366,27.066 h0.6